# Altium PCB DualMetroPrototyp.PcbDoc
Units mm, origin at the board's own origin, x right, y up, seen from the top; angles counter-clockwise.
Board outline 82.55 x 62.23 mm, 2 copper layers (Top Layer, Bottom Layer), stack 1.636 mm thick; 27 components, 70 nets, 206 pads, 15 vias.
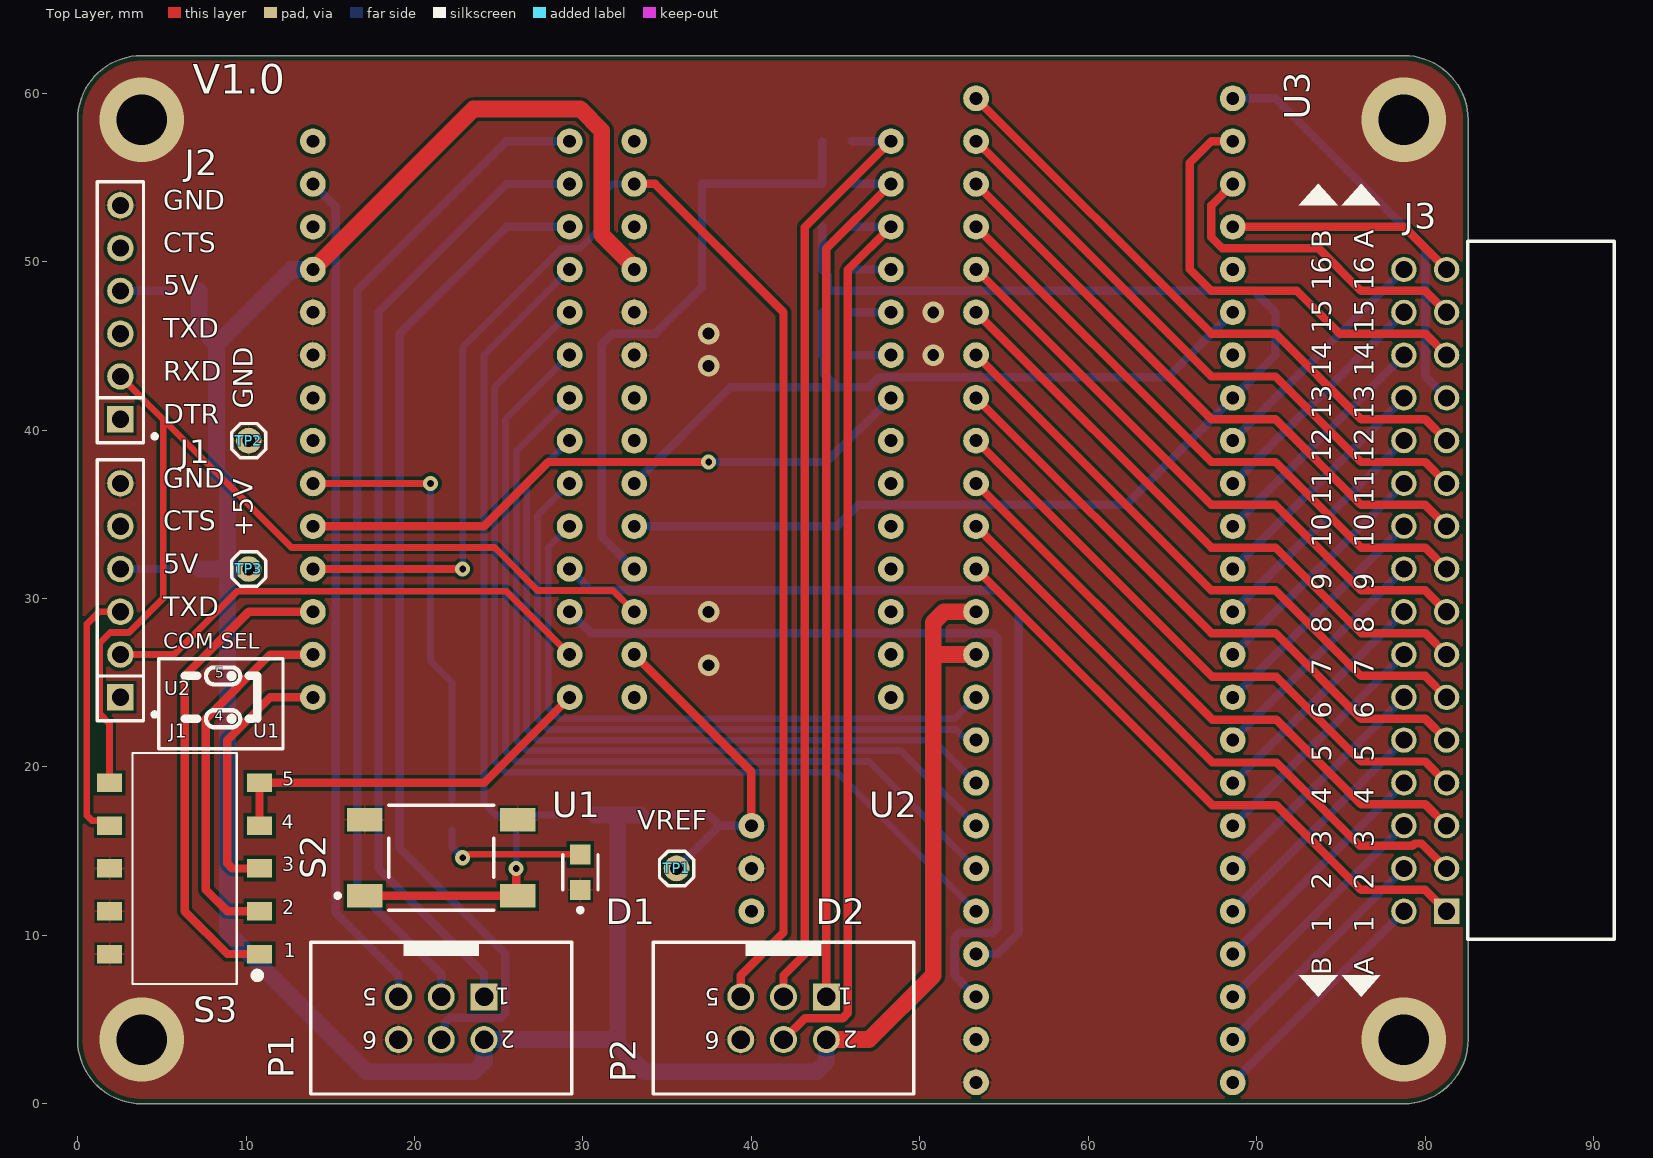
[diagram p0: Top Layer view]
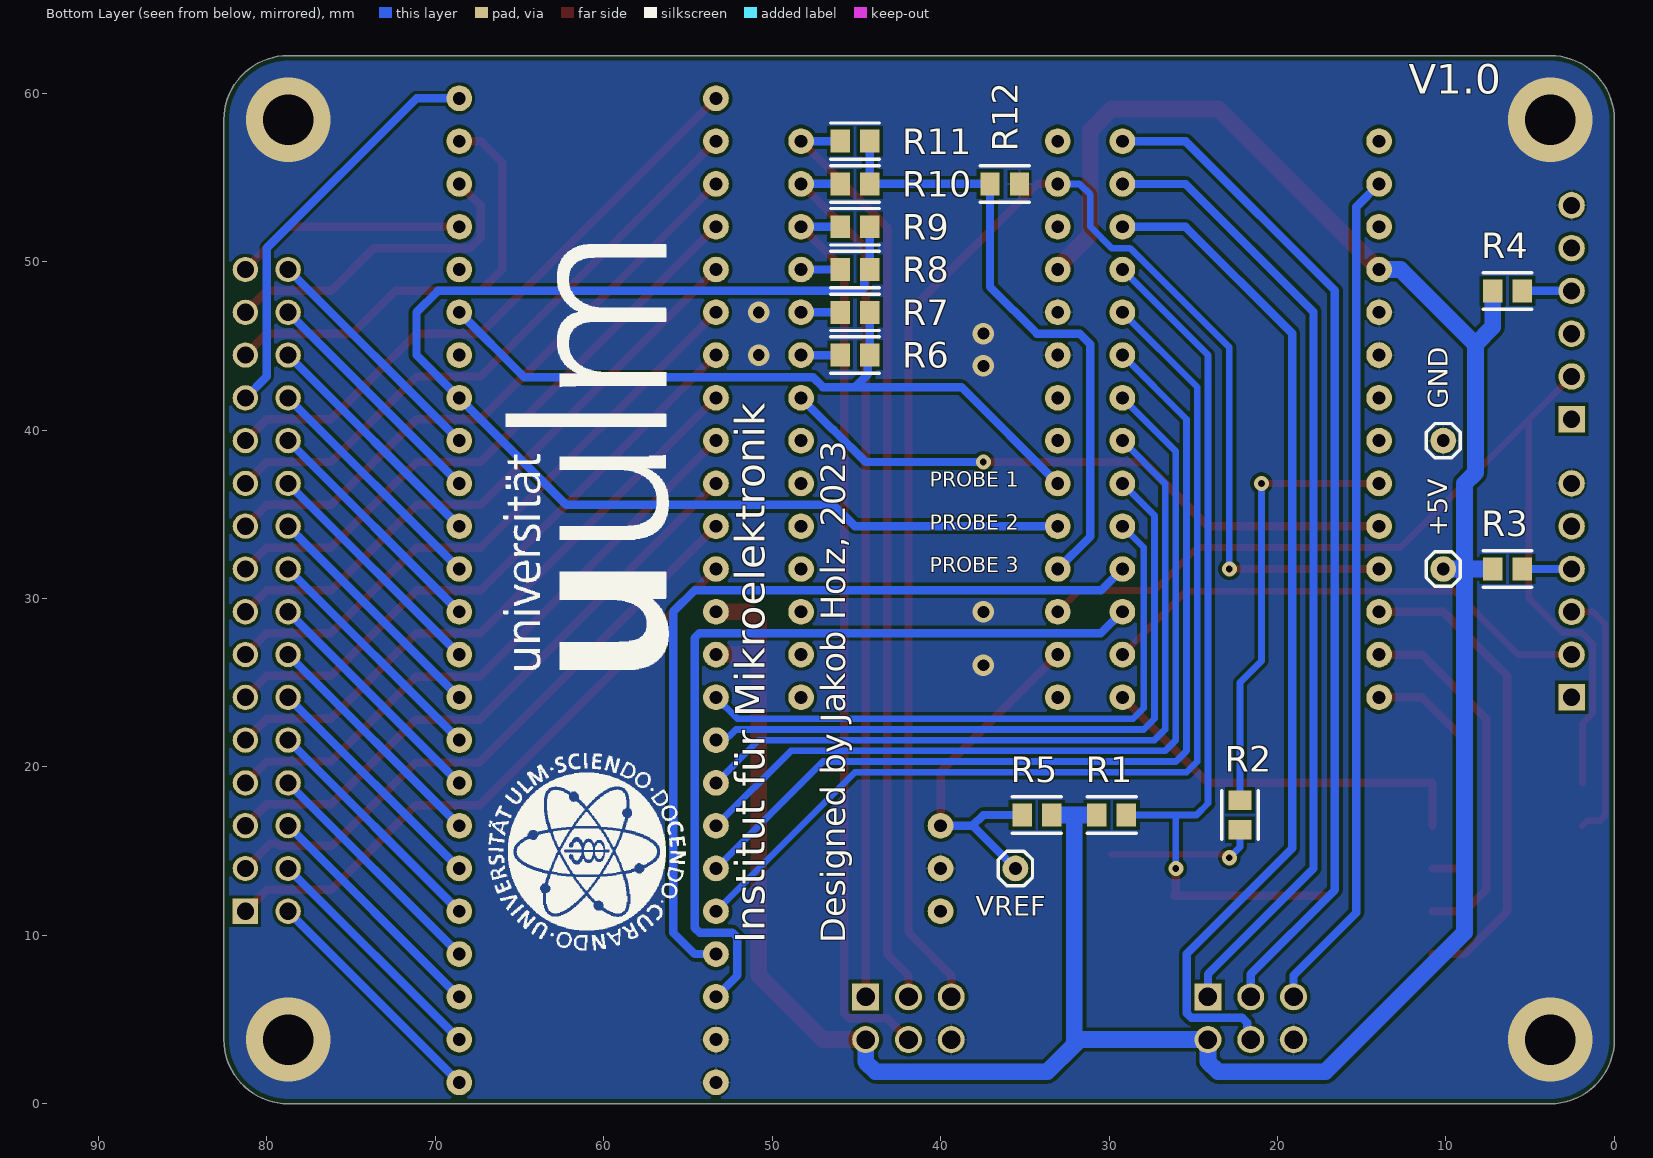
[diagram p1: Bottom Layer view, seen from below]
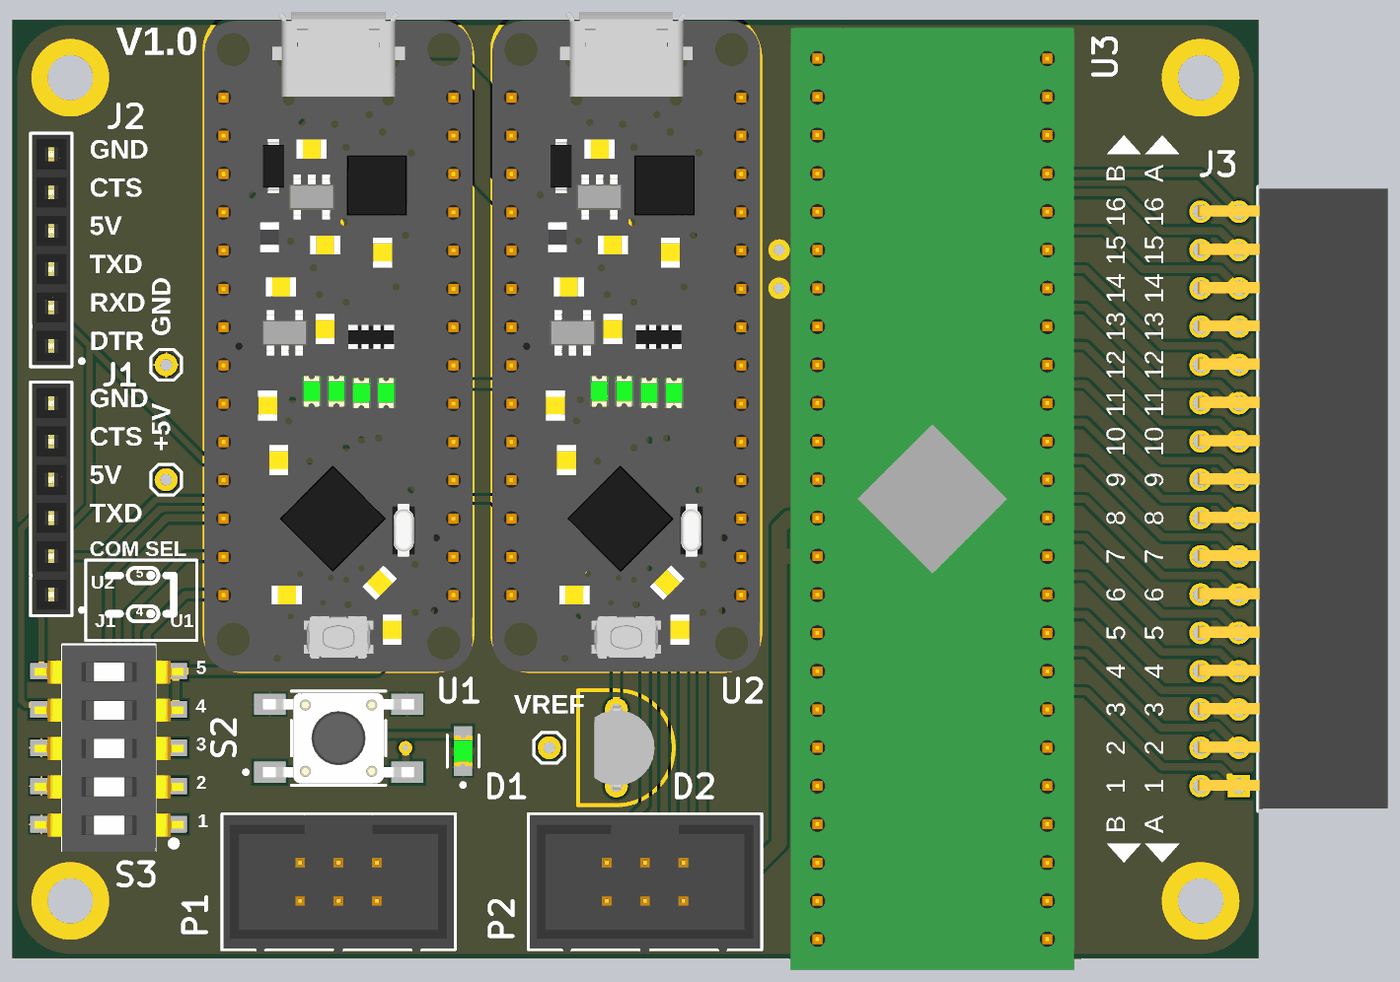
[diagram p2: 3D render of the assembled board from above, using the file's embedded part models]
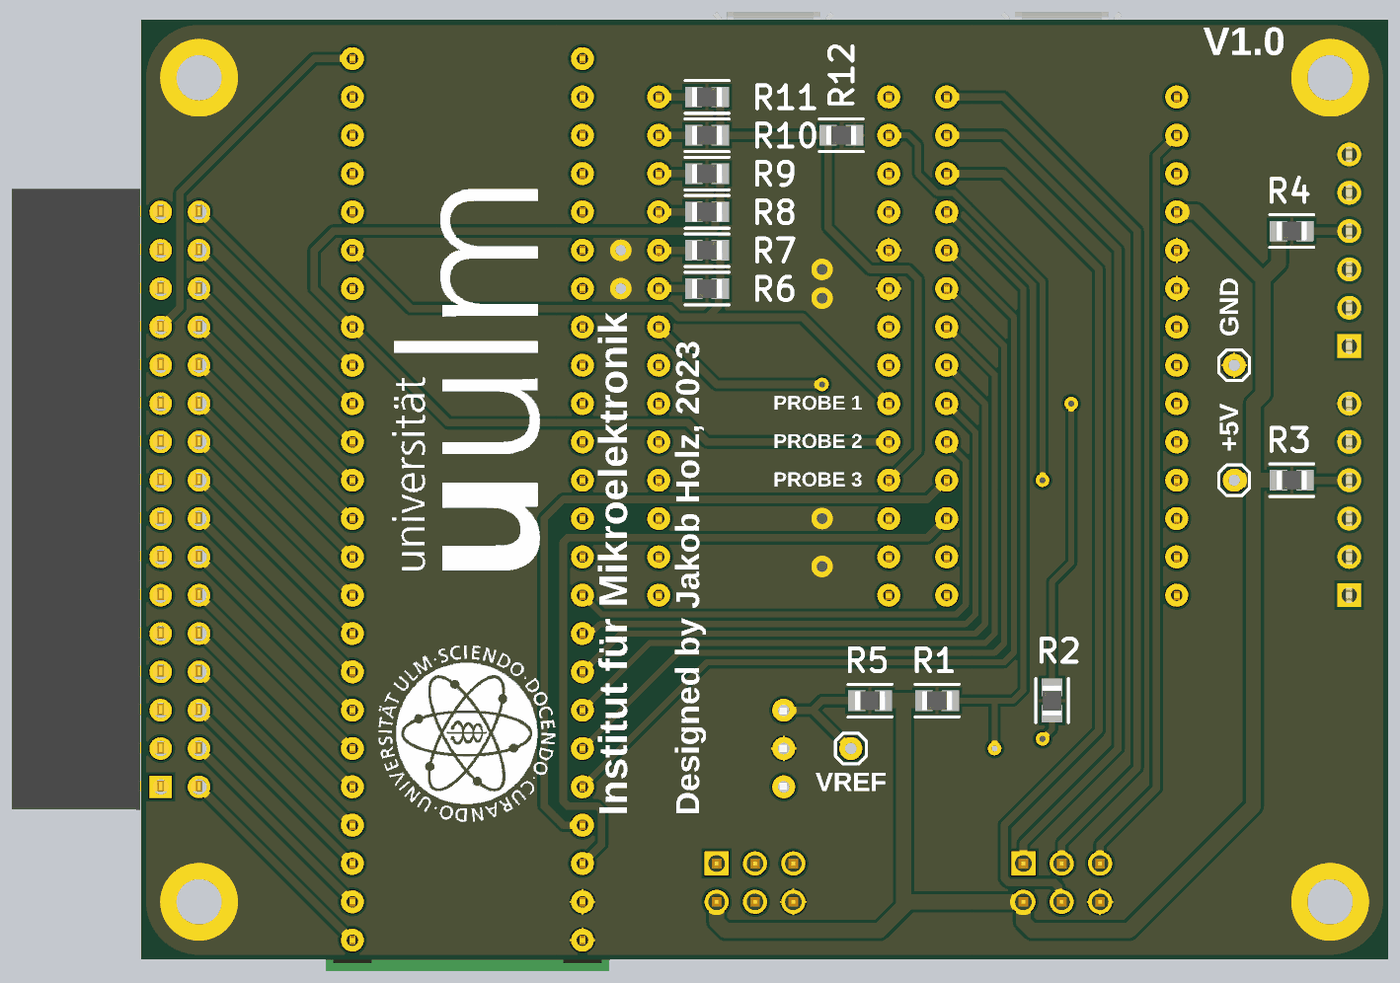
[diagram p3: 3D render of the assembled board from below, using the file's embedded part models]

## Layer stack, top to bottom
Top Solder: solder mask 0.0102, Solder Resist, Dk 3.5
Top Layer: signal copper 0.043
Dielectric 1: dielectric 1.55, FR-4, Dk 4.8
Bottom Layer: signal copper 0.043
Bottom Solder: solder mask 0.0102, Solder Resist, Dk 3.5

## Board outline
0,3.81 0,58.42 cw(c3.81,58.42) 3.81,62.23 78.74,62.23 cw(c78.74,58.42) 82.55,58.42 82.55,3.81 cw(c78.74,3.81) 78.74,0 3.81,0 cw(c3.81,3.81)

## Design rules (kind name [scope] priority, off if disabled: settings)
BoardOutlineClearance [All] p1: gap=0.2 ignorepadtopadclearanceinfootprint=FALSE except(0.3: Arc-OutlineEdge Track-OutlineEdge SMDPad-OutlineEdge THPad-OutlineEdge Via-OutlineEdge Fill-OutlineEdge Poly-OutlineEdge Region-OutlineEdge)
Clearance "Standard Clearance" [All] p1: gap=0.2 ignorepadtopadclearanceinfootprint=FALSE except(0.15: Arc-Text Track-Text SMDPad-Text THPad-Text Via-Text Fill-Text Poly-Text Region-Text Text-Text; 0.25: Arc-Hole Track-Hole SMDPad-Hole THPad-Hole Via-Hole Fill-Hole Poly-Hole Region-Hole Text-Hole)
Clearance "Minimum Clearance" [All] p2: gap=0.15 ignorepadtopadclearanceinfootprint=FALSE except(0.25: Arc-Hole Track-Hole SMDPad-Hole THPad-Hole Via-Hole Fill-Hole Poly-Hole Region-Hole Text-Hole) // Minium clearances in aisler simple process.
ComponentClearance [All] p1: gap=0.127 collisioncheckmode=3 verticalgap=0.127 showdistances=TRUE
DiffPairsRouting [All] p1: maxlimit=0.254 minlimit=0.127 mostfreqgap=0.127 toplayer_minwidth=0.127 toplayer_maxwidth=25.4 toplayer_prefwidth=0.127 bottomlayer_minwidth=0.127 bottomlayer_maxwidth=25.4 bottomlayer_prefwidth=0.127 maxuncoupledlength=12.7
Height [All] p1: minheight=0 maxheight=1816.048 prefheight=12.7
HoleSize [All] p1: absolutevalues=TRUE maxlimit=6.3 minlimit=0.3 maxpercent=80.000 minpercent=20.000
HoleToHoleClearance [All] p1: gap=0.25 allowstackedmicrovias=FALSE
MinimumAnnularRing [All] p1: minimumring=0.2
MinimumSolderMaskSliver [All] p1: minsoldermaskwidth=0
PlaneClearance [All] p1: clearance=0.127
PlaneConnect PlaneConnectPowerPads [InPadClass('PowerPads')] p1: planeconnectstyle=Direct reliefexpansion=0.508 reliefentries=4 reliefconductorwidth=0.254 reliefairgap=0.254
PlaneConnect [All] p2: pad.planeconnectstyle=Relief pad.reliefexpansion=0.3 pad.reliefentries=4 pad.reliefconductorwidth=0.127 pad.reliefairgap=0.127 via.planeconnectstyle=Direct via.reliefexpansion=0.3 via.reliefentries=4 via.reliefconductorwidth=0.127 via.reliefairgap=0.127
PolygonConnect PolygonConnectPowerPads [All vs (InPadClass('PowerPads'))] p1: connectstyle=Direct reliefconductorwidth=0.254 reliefentries=4 polygonreliefangle="90 Angle" airgapwidth=0.254
PolygonConnect [All] p2: thpad.connectstyle=Relief thpad.reliefconductorwidth=0.127 thpad.reliefentries=4 thpad.polygonreliefangle="90 Angle" thpad.airgapwidth=0.127 smdpad.connectstyle=Relief smdpad.reliefconductorwidth=0.127 smdpad.reliefentries=4 smdpad.polygonreliefangle="90 Angle" smdpad.airgapwidth=0.127 via.connectstyle=Direct via.reliefconductorwidth=0.127 via.reliefentries=4 via.polygonreliefangle="90 Angle" via.airgapwidth=0.127
RoutingVias [All] p1: holewidth=0.4 width=0.8 viastyle="Through Hole" minholewidth=0.3 minwidth=0.6 maxholewidth=0.6 maxwidth=6.6
SilkToSilkClearance [All] p1: silktosilkclearance=0
SilkToSolderMaskClearance [IsPad] p1: minsilkscreentomaskgap=0.127 clearancetoexposedcopper=TRUE
SolderMaskExpansion [All] p1: expansion=0.075 istentingtop=FALSE
Width [All] p1: maxlimit=25.4 minlimit=0.2 preferedwidth=0.25 minimp=50.000000 maximp=50.000000 favimp=50.000000
20 further rules are at their usual default settings.

## Classes and differential pairs
component class Sheet2: J3 R6 R8 R10 R12 U3
component class Sheet1: D1 D2 J1 J2 P1 P2 R1 R2 R3 R5 S3 TP1 TP2 TP3 U1 U2

## Components (designator, comment, footprint, x,y, rotation, side; value= is the part's Value field where it differs from the comment)
D1 "LTST-C171GKT" FP-LTST-C171GKT-MFG 29.845,13.75 r90 top
D2 "LT1004" LT1004CZ 40.005,13.97 r180 top
J1 "Serial Adapter" FP-22-28-4060-MFG 2.54,30.48 r180 top
J2 "Serial Adapter" FP-22-28-4060-MFG 2.54,46.99 r180 top
J3 "613032243121" 613032243121 86.89,30.48 r90 top
P1 "61200621621" 61200621621 21.59,5.08 r180 top
P2 "61200621621" 61200621621 41.91,5.08 r180 top
R1 "27k" FP-RMCF0805-IPC_B 29.845,17.145 r0 bottom
R2 "3.2k" FP-RMCF0805-IPC_B 22.225,17.145 r90 bottom
R3 "Jumper" FP-RMCF0805-IPC_B 6.35,31.75 r0 bottom
R4 "Jumper" FP-RMCF0805-IPC_B 6.35,48.26 r0 bottom
R5 "2.2k" FP-RMCF0805-IPC_B 34.29,17.145 r180 bottom
R6 "680R" FP-RMCF0805-IPC_B 45.085,44.45 r0 bottom
R7 "470K" FP-RMCF0805-IPC_B 45.085,46.99 r180 bottom
R8 "680R" FP-RMCF0805-IPC_B 45.085,49.53 r0 bottom
R9 "470K" FP-RMCF0805-IPC_B 45.085,52.07 r180 bottom
R10 "680R" FP-RMCF0805-IPC_B 45.085,54.61 r0 bottom
R11 "470K" FP-RMCF0805-IPC_B 45.085,57.15 r180 bottom
R12 "Jumper" FP-RMCF0805-IPC_B 36.195,54.61 r0 bottom
S2 "TL3301AF160QG" FP-TL3301AF160QG-MFG 21.59,14.605 r0 top
S3 "DS04-254-1-05BK-SMT" SW_DS04-254-1-05BK-SMT 6.35,13.97 r180 top
TP1 "61300111121" 61300111121 35.56,13.97 r90 top
TP2 "61300111121" 61300111121 10.16,39.37 r180 top
TP3 "61300111121" 61300111121 10.16,31.75 r270 top
U1 "Adafruit Metro Mini" "ADAFRUIT METRO MINI" 12.7,62.23 r270 top
U2 "Adafruit Metro Mini" "ADAFRUIT METRO MINI" 31.776,62.23 r270 top
U3 "ADG726BCPZ" "ADG726 BREAKOUT" 53.34,59.69 r0 top

## Footprints (in the part's own frame and the unit in brackets; to place one, negate y for a bottom-side part, rotate by r counter-clockwise, add the part's x,y. Pads: shape width x height; smd on the part's side, far side on the other; paste and mask are expansions set on the pad)
61200621621 [mm] "6 pins, straight, gold plating"
  rect 1.6x1.6 hole 1.1: 1(-2.54,-1.27)
  round 1.6 hole 1.1: 2(-2.54,1.27) 3(0,-1.27) 4(0,1.27) 5(2.54,-1.27) 6(2.54,1.27)
  silkscreen extent -7.74,-4.5 7.74,4.5, body extent -7.64,-4.43 7.64,4.75, height 9.13
61300111121 [mil] "Pin Header, pitch 2.54 mm, THT, Vertical, single row, 1p"
  round 60 hole 30: 1(0,0)
  silkscreen extent -40,-40 40,40
613032243121 [mm] "Socket Header, Pitch 2.54 mm, THT, Angled, dual row, 32p"
  rect 1.5x1.5 hole 1.02: 1(-19.05,5.61)
  round 1.5 hole 1.02: 2(-19.05,8.15) 3(-16.51,5.61) 4(-16.51,8.15) 5(-13.97,5.61) 6(-13.97,8.15) 7(-11.43,5.61) 8(-11.43,8.15) 9(-8.89,5.61) 10(-8.89,8.15) 11(-6.35,5.61) 12(-6.35,8.15) 13(-3.81,5.61) 14(-3.81,8.15) 15(-1.27,5.61) 16(-1.27,8.15) 17(1.27,5.61) 18(1.27,8.15) 19(3.81,5.61) 20(3.81,8.15) 21(6.35,5.61) 22(6.35,8.15) 23(8.89,5.61) 24(8.89,8.15) 25(11.43,5.61) 26(11.43,8.15) 27(13.97,5.61) 28(13.97,8.15) 29(16.51,5.61) 30(16.51,8.15) 31(19.05,5.61) 32(19.05,8.15)
  silkscreen extent -20.72,-4.35 20.72,4.35, body extent -20.57,-4.25 20.57,8.35, height 5.05
"ADAFRUIT METRO MINI" [mil] "ATmega328P development board"
  round 60 hole 30: 1(200,50) 2(300,50) 3(400,50) 4(500,50) 5(600,50) 6(700,50) 7(800,50) 8(900,50) 9(1000,50) 10(1100,50) 11(1200,50) 12(1300,50) 13(1400,50) 14(1500,50) 15(1500,650) 16(1400,650) 17(1300,650) 18(1200,650) 19(1100,650) 20(1000,650) 21(900,650) 22(800,650) 23(700,650) 24(600,650) 25(500,650) 26(400,650) 27(300,650) 28(200,650)
  body extent -21,0 1701,700, height 607
"ADG726 BREAKOUT" [mil]
  round 60 hole 30: 1(0,0) 2(0,-100) 3(0,-200) 4(0,-300) 5(0,-400) 6(0,-500) 7(0,-600) 8(0,-700) 9(0,-800) 10(0,-900) 11(0,-1000) 12(0,-1100) 13(0,-1200) 14(0,-1300) 15(0,-1400) 16(0,-1500) 17(0,-1600) 18(0,-1700) 19(0,-1800) 20(0,-1900) 21(0,-2000) 22(0,-2100) 23(0,-2200) 24(0,-2300) 25(600,-2300) 26(600,-2200) 27(600,-2100) 28(600,-2000) 29(600,-1900) 30(600,-1800) 31(600,-1700) 32(600,-1600) 33(600,-1500) 34(600,-1400) 35(600,-1300) 36(600,-1200) 37(600,-1100) 38(600,-1000) 39(600,-900) 40(600,-800) 41(600,-700) 42(600,-600) 43(600,-500) 44(600,-400) 45(600,-300) 46(600,-200) 47(600,-100) 48(600,0)
  body extent -70,-2380 670,80, height 555
FP-22-28-4060-MFG [mm]
  rect 1.57x1.57 hole 1.02 paste-1000 mask+0: 1(0,6.35)
  round 1.57 hole 1.02 paste-1000 mask+0: 2(0,3.81) 3(0,1.27) 4(0,-1.27) 5(0,-3.81) 6(0,-6.35)
  silkscreen extent -2.16,-7.75 1.37,7.75, body extent -1.27,-7.62 1.23,7.62, height 8.5
FP-LTST-C171GKT-MFG [mm]
  rect 1.2x1.2 smd paste+0 mask+0: 1(-1.05,0) 2(1.05,0)
  silkscreen extent -2.37,-1.05 1.05,1.05, body extent -1.75,-0.77 1.75,0.77, height 0.25
FP-RMCF0805-IPC_B [mm]
  rect 1.155x1.362 smd paste+0 mask+0: 1(-0.876,0) 2(0.876,0)
  silkscreen extent -1.45,-1.08 1.45,1.08, body extent -1,-0.63 1,0.63, height 0.65
FP-TL3301AF160QG-MFG [mm]
  rect 2.1x1.4 smd paste+0 mask+0: 1(-4.55,-2.25) 2(4.55,-2.25) 3(-4.55,2.25) 4(4.55,2.25)
  silkscreen extent -6.27,-3.13 3.13,3.13, body extent -5.7,-3.22 5.7,3.22, height 0.25
LT1004CZ [mil] "Voltage Reference"
  round 60 hole 30: 1(0,100) A(0,-100) K(0,0)
  body extent -100,-108 57,108, height 315
SW_DS04-254-1-05BK-SMT [mm]
  rect 1.5x1.1 smd: 1A(-4.45,5.08) 1B(4.45,5.08) 2A(-4.45,2.54) 2B(4.45,2.54) 3A(-4.45,0) 3B(4.45,0) 4A(-4.45,-2.54) 4B(4.45,-2.54) 5A(-4.45,-5.08) 5B(4.45,-5.08)
  silkscreen extent -4.52,-6.85 3.1,6.85, body extent -4.98,-6.8 4.92,6.9, height 4.56

## Part data
D1: library part CMP-22017-000007-1, "LED GREEN CLEAR CHIP SMD", Case Code (Imperial)=0805, Case Code (Metric)=2012, Color=Green, Forward Current=30mA, Forward Voltage=2.1V, Lens Color=Colorless, Max Operating Temperature=85°C, Min Operating Temperature=-55°C, Package Quantity=1, Power Dissipation=100mW, Reverse Voltage=5V, Supplier Part Number 1=6920935P, Test Current=10mA, Case/Package=0805, Depth=1.25mm, Dominant Wavelength=569nm, Height=0.8mm, Illumination Color=Green, Lead Free="Lead Free", Length=2mm, Lens Style=Diffused, Lens Transparency=Clear, Luminous Intensity=12mcd, Mount="Surface Mount", Number of Elements=1, Number of LEDs=1, Number of Pins=2, Packaging="Tape and Reel", Power Rating=100mW, Radiation Hardening=No, Supplier 1=Rs, Viewing Angle=130°, Wavelength=585nm, Width=1.25mm
J1 J2: library part CMP-04776-000763-1, "CONN HEADER VERT 6POS 2.54MM", Color=Black, Contact Resistance=20mR, Current Rating=4A, Max Operating Temperature=75°C, Max Voltage Rating (AC)=250V, Max Voltage Rating (DC)=250.25kV, Min Operating Temperature=0°C, Package Quantity=1, Connector Type="Male Pin", Contact Material=Brass, Contact Mating Length=0.24inch, Contact Plating=Tin, Contact Type="Male Pin", Depth=2.49mm, Gender=Male, Housing Color=Black, Housing Material=Thermoplastic, Length=15.24mm, Mount="Through Hole", Number of Contacts=6, Number of Positions=6, Number of Rows=1, Orientation=Straight, Packaging=Bulk, Pitch=2.54mm, RoHS Compliant=Yes, Series="KK® 42375", Termination=Solder, Voltage Rating=250V
J3: library part CMP-1502-01445-1, "THT Angled Socket Header WR-PHD, Pitch 2.54 mm, Dual Row, 32 pins", Contact Resistance=20mOhm, Manufacturer="Wurth Elektronik", Operating Temperature=-40to125degC, Rated Current=3A, Withstanding Voltage=500VAC, Working Voltage=250VAC, Datasheet URL=https://katalog.we-online.de/em/datasheet/6130xx243121.pdf, Gender=Female, Manufacturer URL=http://www.we-online.de, Mounting Technology=THT, Orientation=Angled, Package Reference=613032243121, Packaging=Tray, Part Number=613032243121, Pin Number=32, Pitch=2.54mm, Publisher=WurthElektronik, Row Number=Dual
P1 P2: library part CMP-1502-00000-1, "Male Box Header WR-BHD, THT, Vertical, pitch 2.54 mm, 6 pins", Contact Resistance=20mOhm, Manufacturer="Wurth Elektronik", Operating Temperature=-40to125degC, Supplier Part Number 1=8236430, Withstanding Voltage=500VAC, Working Voltage=250VAC, Datasheet URL=https://katalog.we-online.de/em/datasheet/6120xx21621.pdf, Gender=Male, Manufacturer URL=http://www.we-online.de, Mounting Technology=THT, Orientation=Vertical, Package Reference=61200621621, Packaging=Tray, Part Number=61200621621, Pin Number=6, Pitch=2.54mm, Published Date=August2018, Publisher=WurthElektronik, Supplier 1=Rs
R1 R2 R3 R4 R5 R6 R7 R8 R9 R10 R11 R12: library part CMP-26527-000017-1, "RES 0 OHM JUMPER 1/8W 0805", Case Code (Imperial)=0805, Case Code (Metric)=2012, Max Operating Temperature=155°C, Max Power Dissipation=125mW, Min Operating Temperature=-55°C, Resistance=0mR, Case/Package=0805, Composition="Thick Film", Contact Plating=Tin, Depth=1.25mm, Features="Automotive AEC-Q200", Height=0.026inch, Lead Free="Lead Free", Length=2mm, Military Standard=Not, Mount="Surface Mount", Number of Terminations=2, Packaging="Tape and Reel", Power Rating=125mW, Radiation Hardening=No, Width=0.049inch
S2: "Keypad Switch, 1 Switches, SPST, Momentary-tactile, 0.05A, 50VDC, 2.06N, Solder Terminal, Surface Mount-straight12V", Contact Resistance=100mR, Current Rating=50mA, Insulation Resistance=100MR, Max Operating Temperature=70°C, Max Voltage Rating (DC)=50V, Min Operating Temperature=-20°C, Operating Force=160gf, Package Quantity=1000, Supplier Part Number 1=EG2526CT-ND, Voltage Rating (DC)=12V, Actuator Length=1.4mm, Actuator Material=Nylon, Actuator Type=Standard, Contact Material=Silver, Contact Plating=Silver, Electrical Life=100000Cycles, Illumination Type=Non-Illuminated, Lead Free="Lead Free", Mechanical Life=100000Cycles, Mount="Surface Mount", Orientation=Straight, Packaging="Tape and Reel", REACH SVHC="No SVHC", RoHS Compliant=Yes, Series=TL3301, Supplier 1=Digi-Key, Switch Function=Off-Mom, Switch Travel=0.25mm, Termination="Gull Wing", Throw Configuration=SPST, Voltage Rating=50V
S3: Package=None, Availability=Unavailable, MP=DS04-254-1-05BK-SMT, Price=None
TP1 TP2 TP3: library part Testpoint, "THT Vertical Pin Header WR-PHD, Pitch 2.54 mm, Single Row, 1 pins", Contact Resistance=20mOhm, Manufacturer="Wurth Elektronik", Operating Temperature=-40to105degC, Rated Current=3A, Withstanding Voltage=500VAC, Working Voltage=250VAC, Datasheet URL=https://katalog.we-online.de/em/datasheet/6130xx11121.pdf, Gender=Male, Manufacturer URL=http://www.we-online.de, Mounting Technology=THT, Orientation=Vertical, Package Reference=61300111121, Packaging=Bag, Part Number=61300111121, Pin Number=1, Pitch=2.54mm, Publisher=WurthElektronik, Row Number=Single
U3: library part CMP-0798-00018-1, "1.8 to 5.5 V / +/-2.5 V, 4 Ohm, 16-Channel Analog Multiplexer, -40 to 85 degC, 48-pin QFN (CP-48-1), Tray", Manufacturer="Analog Devices", Bandwidth (Hz)=34M, Code_JEDEC=MO-220-VKKD-2, ComponentLink1Description="Manufacturer URL", ComponentLink1URL=http://www.analog.com/en/index.html, ComponentLink2Description=Datasheet, ComponentLink2URL=http://www.analog.com/static/imported-files/data_sheets/ADG726_732.pdf, ComponentLink3Description="Package Specification", ComponentLink3URL=http:/www.analog.com/static/imported-files/packages/PKG_PDF/LFCSP(CP)/CP-48/CP_48_1.pdf, DatasheetVersion="Rev. 0", Max Analog Signal Range="Vss to Vdd", Mounting Technology="Surface Mount", PackageDescription="48-Pin Lead Frame Chip Scale Package, Body 7 x 7 mm, Pitch 0.5 mm", PackageReference=CP-48-1, Packing=Tray, PartNumber=ADG726BCPZ, Ron (ohms)=4, Supply V Guar Performance="Dual_(+/-2.5V), Single_(+3V), Single_(+5V)", t transition (s)=23n

## Via types
v1: diameter 1.27, hole 0.711, Top Layer to Bottom Layer, 6 vias
v2: diameter 0.9, hole 0.4, Top Layer to Bottom Layer, 5 vias
v3: diameter 5, hole 3, Top Layer to Bottom Layer, 4 vias

## Nets (pads, with @x,y where several pads share a name; then routed paths per layer and width w, separated by ;. In a path a pad name is that pad's centre, name@x,y a point inside that pad or via, vN(x,y) a via of type N, cw(c..) or ccw(c..) an arc to the next point about the centre after c; other vN are vias at no path point)
!CSA: U1.23 U3.19 | length 55.9
  Bottom Layer w0.4: U1.23 25.4,40.64 25.4,20.955 26.035,20.32 46.99,20.32 U3.19
!CSB: U1.24 U3.20 | length 60.8
  Bottom Layer w0.4: U1.24 24.765,42.545 24.765,20.32 25.4,19.685 45.085,19.685 U3.20
!ENABLE: U1.17 U3.22 | length 50.1
  Bottom Layer w0.5: U1.17 30.48,27.94 54.317,27.94 54.61,27.647 54.61,10.453 54.317,10.16 52.363,10.16 52.07,9.867 52.07,7.62 U3.22
!WRITE: U1.18 U3.21 | length 49.8
  Bottom Layer w0.5: U1.18 30.48,30.48 54.61,30.48 55.88,29.21 55.88,10.16 54.61,8.89 U3.21
+5: P1.2 P2.2 R1.2 R3.2 R4.2 R5.2 TP3.1 U1.4 U2.4 U3.13 U3.14 | length 173.4
  Top Layer w1: U1.4 23.495,59.055 29.845,59.055 31.115,57.785 31.115,51.603 33.046,49.672 U2.4 ; P2.2 46.99,3.81 50.8,7.62 50.8,26.67 ; U3.14 50.8,26.67 ; U3.13 51.435,29.21 50.8,28.575 50.8,26.67
  Bottom Layer w1: R3.2 8.89,31.75 ; R4.2 7.226,46.114 8.255,45.085 ; TP3.1 8.89,31.75 ; U1.4 12.7,49.53 8.255,45.085 ; R1.2 32.067,17.145 ; R5.2 32.067,17.145 ; P2.2 44.45,2.491 43.864,1.905 33.655,1.905 32.067,3.492 ; 8.255,45.085 8.255,37.465 8.89,36.83 8.89,31.75 ; 8.89,31.75 8.89,10.16 17.145,1.905 23.544,1.905 24.13,2.491 P1.2 31.75,3.81 32.067,3.492 ; 32.067,3.492 32.067,17.145
A0: U1.19 U3.15 | length 37.5
  Bottom Layer w0.4: U1.19 27.94,33.02 27.94,23.495 28.575,22.86 52.07,22.86 U3.15
A1: U1.20 U3.16 | length 41.3
  Bottom Layer w0.4: U1.20 27.305,34.925 27.305,22.86 27.94,22.225 52.154,22.225 52.574,21.805 53.125,21.805 U3.16
A2: U1.21 U3.17 | length 46.2
  Bottom Layer w0.4: U1.21 26.67,36.83 26.67,22.225 27.305,21.59 50.8,21.59 U3.17
A3: U1.22 U3.18 | length 51
  Bottom Layer w0.4: U1.22 26.035,38.735 26.035,21.59 26.67,20.955 48.895,20.955 U3.18
BTN: R1.1 S2.1 S2.2 U1.25 | length 52.9
  Top Layer w0.5: S2.1 S2.2 26.035,12.46 v2(26.035,13.97)
  Bottom Layer w0.4: v2(26.035,13.97) 26.035,17.145 ; R1.1 26.035,17.145 ; U1.25 24.13,44.45 24.13,17.86 24.113,17.843 24.812,17.145 26.035,17.145
GND: D1.1 D2.K J1.6 J2.6 P1.6 P2.6 R12.1 S2.3 S2.4 S3.1B S3.2B S3.3B TP2.1 U1.5 U1.6 U2.5 U2.6 U3.23 U3.24
  other v1: 37.465,26.035 37.465,29.21 37.465,43.815 50.8,44.45 37.465,45.72 50.8,46.99
  other v3: 3.81,3.81 78.74,3.81 3.81,58.42 78.74,58.42
J1_5V: J2.4 R4.1 | length 2.9
  Bottom Layer w0.5: J2.4 R4.1
J1_TX: J1.3 S3.4B | length 15.3
  Top Layer w0.4: S3.4B 1.6,16.81 0.843,16.81 0.55,17.103 0.55,28.49 1.27,29.21 J1.3
J2_5V: J1.4 R3.1 | length 2.9
  Bottom Layer w0.5: J1.4 R3.1
MISO1: P1.1 U1.27 | length 57.7
  Bottom Layer w0.5: P1.1 24.13,7.698 17.862,13.966 17.862,47.015 25.453,54.606 U1.27@29.206,54.606
MISO2: P2.1 R10.2 U2.27 | length 52.2
  Top Layer w0.5: P2.1 44.45,50.774 U2.27
  Bottom Layer w0.5: R10.2 U2.27
MOSI1: P1.4 U1.26 | length 60.6
  Bottom Layer w0.5: P1.4 21.789,4.009 21.789,4.803 22.082,5.096 25.112,5.096 25.38,5.364 25.38,8.91 19.132,15.158 19.132,45.745 25.453,52.066 U1.26@29.206,52.066
MOSI2: P2.4 R9.1 U2.26 | length 54.5
  Top Layer w0.5: P2.4 43.18,5.08 45.427,5.08 45.72,5.373 45.72,49.504 U2.26
  Bottom Layer w0.5: R9.1 U2.26
NetD1_2: D1.2 R2.1 | length 9
  Top Layer w0.4: v2(22.86,14.605) 22.995,14.605 23.21,14.82 29.825,14.82 D1.2
  Bottom Layer w0.4: R2.1 22.225,15.24 v2(22.86,14.605)
NetD2_A: D2.A R5.1 TP1.1 U2.13 | length 21.5
  Top Layer w0.5: U2.13 40.005,19.711 D2.A@40.005,16.71
  Bottom Layer w0.5: R5.1 37.465,17.145 38.1,16.51 ; TP1.1 38.1,16.51 ; D2.A 38.1,16.51
NetR2_2: R2.2 U1.9 | length 26.3
  Top Layer w0.4: U1.9 v2(20.955,36.83)
  Bottom Layer w0.4: v2(20.955,36.83) 20.955,26.285 22.225,25.015 R2.2
PB0: R6.2 U2.23 | length 2.3
  Bottom Layer w0.5: R6.2 U2.23
PB1: R7.1 U2.24 | length 2.3
  Bottom Layer w0.5: R7.1 U2.24
PB2: R8.2 U2.25 | length 2.3
  Bottom Layer w0.5: R8.2 U2.25
Probe1: R6.1 R7.2 U2.9 U3.43 | length 44.5
  Bottom Layer w0.5: U2.9 38.761,42.545 44.209,42.545 44.45,42.545 45.085,42.545 ; R7.2 R6.1 44.318,44.341 44.318,43.312 45.085,42.545 ; U3.43 64.712,43.122 47.567,43.122 46.99,42.545 45.085,42.545
Probe2: R8.1 R9.2 U2.10 U3.41 | length 75.8
  Bottom Layer w0.5: U2.10 45.085,34.29 46.355,35.56 62.23,35.56 U3.41 71.12,44.45 71.12,46.99 69.85,48.26 44.743,48.26 44.537,48.466 44.537,49.203 R8.1 R9.2
Probe3: R10.1 R11.2 R12.2 U2.11 | length 37.3
  Bottom Layer w0.5: U2.11 31.115,33.681 31.115,45.085 31.75,45.72 34.29,45.72 37.071,48.501 R12.2 R10.1 R11.2
RESET1: P1.5 U1.2 | length 50.4
  Bottom Layer w0.5: U1.2 15.322,53.258 15.322,11.348 19.05,7.62 P1.5
RESET2: P2.5 U1.11 U2.2 | length 91.1
  Top Layer w0.5: U1.11 v2(22.86,31.75) ; U2.2 34.29,54.61 41.91,46.99 41.91,10.16 39.37,7.62 P2.5
  Bottom Layer w0.4: v2(22.86,31.75) 22.86,44.894 28.766,50.8 29.845,50.8 31.115,52.07 31.115,53.975 31.75,54.61 U2.2
S1A: J3.1 U3.12 | length 36.4
  Top Layer w0.5: U3.12 67.368,17.722 71.178,17.722 76.2,12.7 80.01,12.7 J3.1
S1B: J3.2 U3.25 | length 14.4
  Bottom Layer w0.5: U3.25 J3.2
S2A: J3.3 U3.11 | length 36.5
  Top Layer w0.5: U3.11 67.368,20.262 71.178,20.262 76.13,15.31 79.237,15.31 79.381,15.454 79.796,15.454 J3.3
S2B: J3.4 U3.26 | length 14.4
  Bottom Layer w0.5: U3.26 J3.4
S3A: J3.5 U3.10 | length 36.4
  Top Layer w0.5: U3.10 67.368,22.802 71.178,22.802 76.2,17.78 80.01,17.78 J3.5
S3B: J3.6 U3.27 | length 14.4
  Bottom Layer w0.5: U3.27 J3.6
S4A: J3.7 U3.9 | length 36.4
  Top Layer w0.5: U3.9 67.368,25.342 71.178,25.342 76.2,20.32 80.01,20.32 J3.7
S4B: J3.8 U3.28 | length 14.4
  Bottom Layer w0.5: U3.28 J3.8
S5A: J3.9 U3.8 | length 36.4
  Top Layer w0.5: U3.8 67.31,27.94 71.12,27.94 76.2,22.86 80.01,22.86 J3.9
S5B: J3.10 U3.29 | length 14.4
  Bottom Layer w0.5: U3.29 J3.10
S6A: J3.11 U3.7 | length 36.4
  Top Layer w0.5: U3.7 67.31,30.48 71.12,30.48 76.2,25.4 80.01,25.4 J3.11
S6B: J3.12 U3.30 | length 14.4
  Bottom Layer w0.5: U3.30 J3.12
S7A: J3.13 U3.6 | length 36.4
  Top Layer w0.5: U3.6 67.31,33.02 71.12,33.02 76.2,27.94 80.01,27.94 J3.13
S7B: J3.14 U3.31 | length 14.4
  Bottom Layer w0.5: U3.31 J3.14
S8A: J3.15 U3.5 | length 36.4
  Top Layer w0.5: U3.5 67.31,35.56 71.12,35.56 76.2,30.48 80.01,30.48 J3.15
S8B: J3.16 U3.32 | length 14.4
  Bottom Layer w0.5: U3.32 J3.16
S9A: J3.17 U3.4 | length 36.4
  Top Layer w0.5: U3.4 67.31,38.1 71.12,38.1 76.2,33.02 80.01,33.02 J3.17
S9B: J3.18 U3.33 | length 14.4
  Bottom Layer w0.5: U3.33 J3.18
S10A: J3.19 U3.3 | length 36.4
  Top Layer w0.5: U3.3 67.31,40.64 71.12,40.64 76.2,35.56 80.01,35.56 J3.19
S10B: J3.20 U3.34 | length 14.4
  Bottom Layer w0.5: U3.34 J3.20
S11A: J3.21 U3.2 | length 36.4
  Top Layer w0.5: U3.2 67.31,43.18 71.12,43.18 76.2,38.1 80.01,38.1 J3.21
S11B: J3.22 U3.35 | length 14.4
  Bottom Layer w0.5: U3.35 J3.22
S12A: J3.23 U3.1 | length 36.4
  Top Layer w0.5: U3.1 67.31,45.72 71.12,45.72 76.2,40.64 80.01,40.64 J3.23
S12B: J3.24 U3.36 | length 14.4
  Bottom Layer w0.5: U3.36 J3.24
S13A: J3.25 U3.48 | length 24.5
  Bottom Layer w0.5: U3.48 71.12,59.69 80.01,50.8 80.01,43.18 J3.25
S13B: J3.26 U3.37 | length 14.4
  Bottom Layer w0.5: U3.37 J3.26
S14A: J3.27 U3.47 | length 26.8
  Top Layer w0.5: U3.47 67.31,57.15 66.04,55.88 66.04,49.53 67.31,48.26 72.39,48.26 74.93,45.72 80.01,45.72 J3.27
S14B: J3.28 U3.38 | length 14.4
  Bottom Layer w0.5: U3.38 J3.28
S15A: J3.29 U3.46 | length 19.5
  Top Layer w0.5: U3.46 67.31,53.34 67.31,51.435 67.945,50.8 73.66,50.8 76.2,48.26 80.01,48.26 J3.29
S15B: J3.30 U3.39 | length 14.4
  Bottom Layer w0.5: U3.39 J3.30
S16A: J3.31 U3.45 | length 14.1
  Top Layer w0.5: U3.45 78.74,52.07 J3.31@81.531,49.279
S16B: J3.32 U3.40 | length 14.4
  Bottom Layer w0.5: U3.40 J3.32
SCK1: P1.3 U1.28 | length 60.3
  Bottom Layer w0.5: P1.3 21.59,7.698 16.592,12.696 16.592,48.285 25.453,57.146 U1.28@29.206,57.146
SCK2: P2.3 R11.1 U2.28 | length 55.8
  Top Layer w0.5: P2.3 41.91,7.62 43.18,8.89 43.18,52.044 U2.28
  Bottom Layer w0.5: R11.1 U2.28
START: U1.10 U2.22 | length 37.5
  Top Layer w0.5: U1.10 24.13,34.29 27.94,38.1 v2(37.465,38.1)
  Bottom Layer w0.5: v2(37.465,38.1) 44.45,38.1 46.355,40.005 46.381,40.005 U2.22
SW1: S3.1A U1.12 | length 28.7
  Top Layer w0.5: S3.1A 8.89,8.89 6.35,11.43 6.35,25.4 10.16,29.21 U1.12
SW2: S3.2A U1.13 | length 21.8
  Top Layer w0.5: S3.2A 8.89,11.43 7.62,12.7 7.62,22.86 11.43,26.67 U1.13
SW3: S3.3A U1.14 | length 15.5
  Top Layer w0.5: S3.3A 9.183,13.97 8.89,14.263 8.89,21.59 11.43,24.13 U1.14
TXD1: J1.2 U1.16 | length 29.8
  Top Layer w0.4: J1.2 5.715,26.67 9.467,30.422 25.458,30.422 U1.16
TXD2: J2.2 S3.5B U2.12 | length 60.4
  Top Layer w0.4: S3.5B 1.9,22.564 1.305,23.159 1.305,27.34 1.94,27.975 3.052,27.975 5.08,30.003 5.08,40.64 ; J2.2 5.08,40.64 ; U2.12 31.776,30.48 27.305,30.48 24.765,33.02 12.7,33.02 5.08,40.64
  Bottom Layer w0.5: U2.12@33.02,29.21 U2.12
U1_RX: S3.4A S3.5A U1.15 | length 23.1
  Top Layer w0.5: S3.4A S3.5A 24.13,19.05 U1.15
pads on no net: D2.1 J1.1 J1.5 J2.1 J2.3 J2.5 U1.1 U1.3 U1.7 U1.8 U2.1 U2.3 U2.7 U2.8 U2.14 U2.15 U2.16 U2.17 U2.18 U2.19 U2.20 U2.21 U3.42 U3.44

## Polygon pours and split planes (outlines as drawn)
GND on Bottom Layer "GND_L02_P000" (solid, remove dead copper, pour order 0): 0,62.23 0,0 82.55,0 82.55,62.23
GND on Top Layer "GND_L01_P001" (solid, pour order 1): 0,62.23 0,0 82.55,0 82.55,62.23

## Silkscreen, mask and mechanical layers (free items; w line width, h text height)
Top Overlay:
  circle w0.4: c9.144,22.86 r0.1
  circle w0.4: c9.144,25.4 r0.1
  region: 72.509,7.62 73.66,6.35 74.81,7.62
  region: 74.811,53.34 73.66,54.61 72.51,53.34
  region: 77.351,53.34 76.2,54.61 75.05,53.34
  region: 75.049,7.62 76.2,6.35 77.35,7.62
  lines w0.2: 4.826,21.082 12.192,21.082 12.192,26.416 4.826,26.416 4.826,21.082
  lines w0.254: 8.128,22.352 cw(c8.128,22.86) 8.128,23.368 9.144,23.368 cw(c9.144,22.86) 9.144,22.352 8.128,22.352 ; 8.128,24.892 cw(c8.128,25.4) 8.128,25.908 9.144,25.908 cw(c9.144,25.4) 9.144,24.892 8.128,24.892
  lines w0.5: 6.35,22.86 7.112,22.86 ; 6.35,25.4 7.112,25.4 ; 10.16,22.86 10.668,22.86 10.668,25.4 10.16,25.4
  text "V1.0" at 6.83,59.378 h3
  text "B" at 74.81,50.8 h2 r90
  text "A" at 77.35,50.8 h2 r90
  text "16" at 74.81,48.26 h2 r90
  text "16" at 77.35,48.26 h2 r90
  text "15" at 74.81,45.72 h2 r90
  text "15" at 77.35,45.72 h2 r90
  text "14" at 74.81,43.18 h2 r90
  text "14" at 77.35,43.18 h2 r90
  text "GND" at 10.799,41.275 h2 r90
  text "13" at 74.81,40.64 h2 r90
  text "13" at 77.35,40.64 h2 r90
  text "12" at 74.81,38.1 h2 r90
  text "12" at 77.35,38.1 h2 r90
  text "11" at 74.81,35.56 h2 r90
  text "11" at 77.35,35.56 h2 r90
  text "+5V" at 10.788,33.655 h2 r90
  text "10" at 74.81,33.02 h2 r90
  text "10" at 77.35,33.02 h2 r90
  text "9" at 74.81,30.48 h2 r90
  text "9" at 77.35,30.48 h2 r90
  text "8" at 74.81,27.94 h2 r90
  text "8" at 77.35,27.94 h2 r90
  text "COM SEL" at 5.08,26.689 h1.6
  text "7" at 74.81,25.4 h2 r90
  text "7" at 77.35,25.4 h2 r90
  text "5" at 8.167,25.09 h1
  text "U2" at 5.158,23.994 h1.4
  text "6" at 74.81,22.86 h2 r90
  text "6" at 77.35,22.86 h2 r90
  text "4" at 8.152,22.539 h1
  text "J1" at 5.438,21.454 h1.4
  text "U1" at 10.414,21.454 h1.4
  text "5" at 74.81,20.32 h2 r90
  text "5" at 77.35,20.32 h2 r90
  text "5" at 12.145,18.616 h1.4
  text "4" at 74.81,17.78 h2 r90
  text "4" at 77.35,17.78 h2 r90
  text "4" at 12.124,16.061 h1.4
  text "VREF" at 33.218,15.87 h2
  text "3" at 74.81,15.24 h2 r90
  text "3" at 77.35,15.24 h2 r90
  text "3" at 12.148,13.529 h1.4
  text "2" at 74.81,12.7 h2 r90
  text "2" at 77.35,12.7 h2 r90
  text "2" at 12.145,10.981 h1.4
  text "1" at 74.81,10.16 h2 r90
  text "1" at 77.35,10.16 h2 r90
  text "1" at 12.25,8.441 h1.4
  text "B" at 74.81,7.62 h2 r90
  text "A" at 77.35,7.62 h2 r90
Bottom Overlay:
  drawing of 78 lines, arcs and shapes, not listed
  text "V1.0" at 12.22,59.378 h3
  text "GND" at 9.521,41.275 h2 r270
  text "PROBE 1" at 40.64,36.325 h1.52
  text "PROBE 2" at 40.64,33.785 h1.52
  text "+5V" at 9.532,33.655 h2 r270
  text "PROBE 3" at 40.64,31.245 h1.52
  text "VREF" at 37.902,10.79 h2
  text "Designed by Jakob Holz, 2023" at 45.152,9.525 h2.5 r270
  text "Institut für Mikroelektronik" at 49.839,9.525 h3 r270
Board Shape:
  the board outline again, w0.254

## Text inside footprints (layer, text, board x,y; h text height)
J1: Top Overlay "GND" at 5.08,36.191 h2; Top Overlay "CTS" at 5.08,33.651 h2; Top Overlay "5V" at 5.08,31.122 h2; Top Overlay "TXD" at 5.08,28.57 h2
J2: Top Overlay "GND" at 5.08,52.701 h2; Top Overlay "CTS" at 5.08,50.161 h2; Top Overlay "5V" at 5.08,47.632 h2; Top Overlay "TXD" at 5.08,45.08 h2; Top Overlay "RXD" at 5.08,42.54 h2; Top Overlay "DTR" at 5.08,40 h2
P1: Top Overlay "1" at 25.69,6.88 h1.02 r180; Top Overlay "6" at 17.79,4.28 h1.02 r180; Top Overlay "2" at 25.99,4.34 h1.02 r180; Top Overlay "5" at 17.79,6.82 h1.02 r180
P2: Top Overlay "5" at 38.11,6.82 h1.02 r180; Top Overlay "2" at 46.31,4.34 h1.02 r180; Top Overlay "6" at 38.11,4.28 h1.02 r180; Top Overlay "1" at 46.01,6.88 h1.02 r180